# Altium PCB Range_RearSide.PcbDoc
Units mil, origin at the board's own origin, x right, y up, seen from the top; angles counter-clockwise.
Board outline 420 x 340 mil, 2 copper layers (Top Layer, Bottom Layer); 4 components, 6 nets, 22 pads, 4 vias.
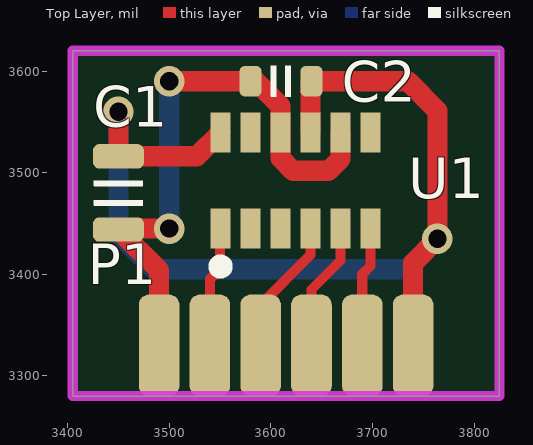
[diagram p0: Top Layer view]
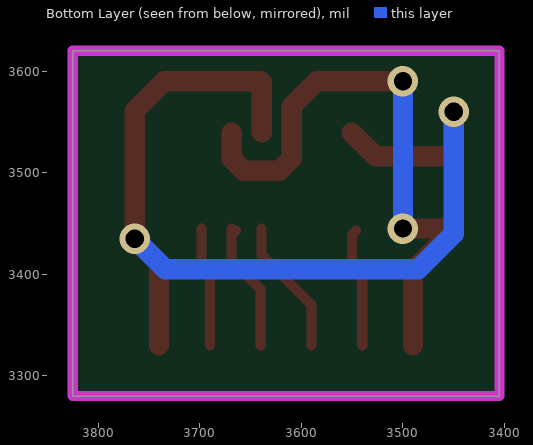
[diagram p1: Bottom Layer view, seen from below]

## Layer stack, top to bottom
Top Solder: solder mask 0.4, Solder Resist, Dk 3.5
Top Layer: signal copper 1.4
Dielectric 1: dielectric 12.6, FR-4, Dk 4.8
Bottom Layer: signal copper 1.4
Bottom Solder: solder mask 0.4, Solder Resist, Dk 3.5

## Board outline
3405,3280 3405,3620 3825,3620 3825,3280

## Design rules (kind name [scope] priority, off if disabled: settings)
Clearance Clearance_1 [OnLayer('Keep-Out Layer')] p1: gap=8 ignorepadtopadclearanceinfootprint=FALSE except(0: Arc-SMDPad Arc-Hole Track-SMDPad Track-Hole SMDPad-Hole THPad-Hole Via-Hole Fill-Hole Poly-Hole Region-Hole Text-Hole)
Clearance [All] p2: gap=8 ignorepadtopadclearanceinfootprint=FALSE except(0: Arc-Hole Track-Hole SMDPad-Hole THPad-Hole Via-Hole Fill-Hole Poly-Hole Region-Hole Text-Hole)
ComponentClearance [All] p1: gap=0 collisioncheckmode=3 verticalgap=10 showdistances=FALSE
PolygonConnect [All] p1: connectstyle=Relief reliefconductorwidth=10 reliefentries=4 polygonreliefangle="90 Angle" airgapwidth=10
RoutingVias [All] p1: holewidth=18 width=30 viastyle="Through Hole" minholewidth=18 minwidth=30 maxholewidth=18 maxwidth=30
SolderMaskExpansion [All] p1: expansion=4
Width Width_GND [InNet('GND')] p1: maxlimit=30 minlimit=10 preferedwidth=20 minimp=50.000000 maximp=50.000000 favimp=50.000000
Width Width_VCC [InNet('VCC2.8V')] p2: maxlimit=30 minlimit=10 preferedwidth=20 minimp=50.000000 maximp=50.000000 favimp=50.000000
Width [All] p3: maxlimit=10 minlimit=10 preferedwidth=10
29 further rules are at their usual default settings.

## Components (designator, comment, footprint, x,y, rotation, side; value= is the part's Value field where it differs from the comment)
C1 "Cap_0805" CAP_0805 3450,3480 r270 top value=10uF
C2 "Cap_0603" CAP_0603 3610,3590 r180 top value=0.1uF
P1 "HDR1x6_1.27" HDR1X6_1.27_180H_SMD 3490,3330 r270 top
U1 "VL6180X" LGA12_ST_4.8X2.8X1MM 3624.29,3492.24 r90 top

## Footprints (in the part's own frame and the unit in brackets; to place one, negate y for a bottom-side part, rotate by r counter-clockwise, add the part's x,y. Pads: shape width x height; smd on the part's side, far side on the other; paste and mask are expansions set on the pad)
CAP_0603 [mil]
  rrect50% 22x30 smd: 1(-30,0) 2(30,0)
  silkscreen extent -10,-15 10,15, body extent -31,-16 31,16, height 31
CAP_0805 [mil]
  rrect50% 24x50 smd: 1(-36,0) 2(36,0)
  silkscreen extent -12,-24 12,24, body extent -39,-25 39,25, height 39
HDR1X6_1.27_180H_SMD [mil]
  rrect50% 100x40 smd: 1(0,0) 2(0,50) 3(0,100) 4(0,150) 5(0,200) 6(0,250)
LGA12_ST_4.8X2.8X1MM [mm] "VL6180, LGA12 4.8X2.8X1MM"
  rect 1x0.5 smd: 1(-1.2,1.875) 2(-1.2,1.125) 3(-1.2,0.375) 4(-1.2,-0.375) 5(-1.2,-1.125) 6(-1.2,-1.875) 7(1.2,-1.875) 8(1.2,-1.125) 9(1.2,-0.375) 10(1.2,0.375) 11(1.2,1.125) 12(1.2,1.875)
  silkscreen extent -2.3,1.72 -2,2.02

## Part data
C1 C2: "Capacitor"
P1: "Header"
U1: "VL6180x Proximity and Light Sensor with Gesture Recognition    Supply Level: 2.8V (3.0V Max!)  Range: 0-10cm  Light Sensor: 0..100K Lux (16-bit output)  IR emitter: 850 nm  I2C Address: 0x29 (7-bit)", VDD="VDD: 2.8V  / Op. Temp: -20~70°C"

## Via types
v1: diameter 30, hole 18, Top Layer to Bottom Layer, 4 vias

## Nets (pads, with @x,y where several pads share a name; then routed paths per layer and width w, separated by ;. In a path a pad name is that pad's centre, name@x,y a point inside that pad or via, vN(x,y) a via of type N, cw(c..) or ccw(c..) an arc to the next point about the centre after c; other vN are vias at no path point)
GND: C1.1 C2.1 P1.6 U1.9 U1.12 | length 1043
  Top Layer w20: v1(3450,3560) C1.1 3526.99,3516 U1.12 ; U1.9 3639.05,3589.05 C2.1 3735,3590 3764,3561 v1(3764,3435) 3740,3411 P1.6
  Bottom Layer w20: v1(3450,3560) 3450,3440 3485,3405 3734,3405 v1(3764,3435)
GPIO_OUT: P1.2 U1.1 | length 118.5
  Top Layer w10: P1.2 3540,3395 3550,3405 3550,3438.94 U1.1@3546.18,3442.76
SCL_2.8V: P1.4 U1.5 | length 132.9
  Top Layer w10: P1.4 3640,3385 3668.58,3413.58 U1.5@3668.58,3438.47 ; U1.5@3664.29,3442.76 U1.5@3668.58,3438.47 ; U1.5 U1.5@3668.58,3438.47
SDA_2.8V: P1.5 U1.6 | length 118.4
  Top Layer w10: P1.5 3690,3400 3698.11,3408.11 U1.6
SHDN_2.8V: P1.3 U1.4 | length 135.3
  Top Layer w10: P1.3 3590,3370 3639.05,3419.05 U1.4
VCC2.8V: C1.2 C2.2 P1.1 U1.8 U1.10 | length 592
  Top Layer w20: P1.1 3490,3404 C1.2 3451,3445 v1(3500,3445) ; v1(3500,3590) C2.2 3585,3590 3609.53,3565.47 U1.10 3609.53,3514.01 3621.75,3501.8 3656.8,3501.8 3668.58,3513.58 U1.8
  Bottom Layer w20: v1(3500,3445) v1(3500,3590)
pads on no net: U1.2 U1.3 U1.7 U1.11

## Keep-outs
Keep-Out Layer:
  the board outline again, w10